# EAGLE board KAI_bat (EAGLE 9.5.1)
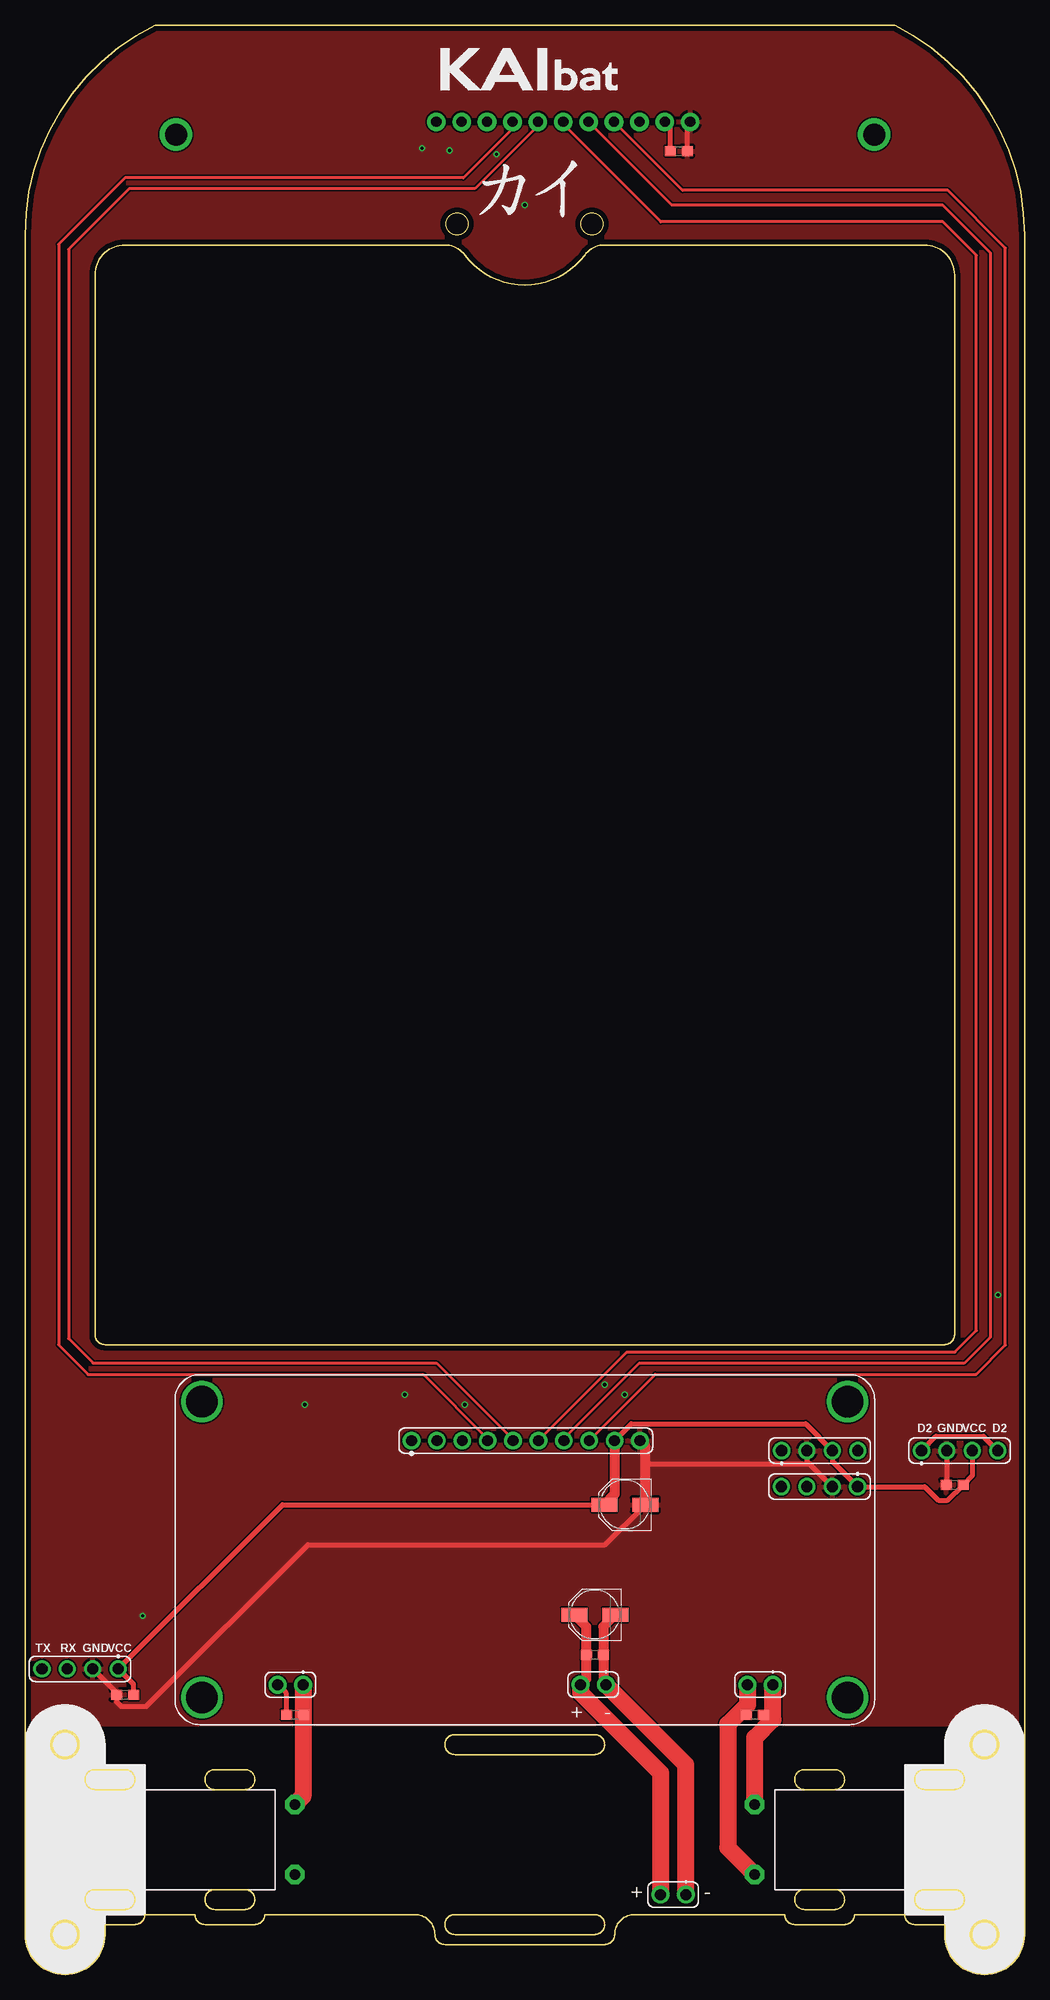
[diagram p0: board, top side]
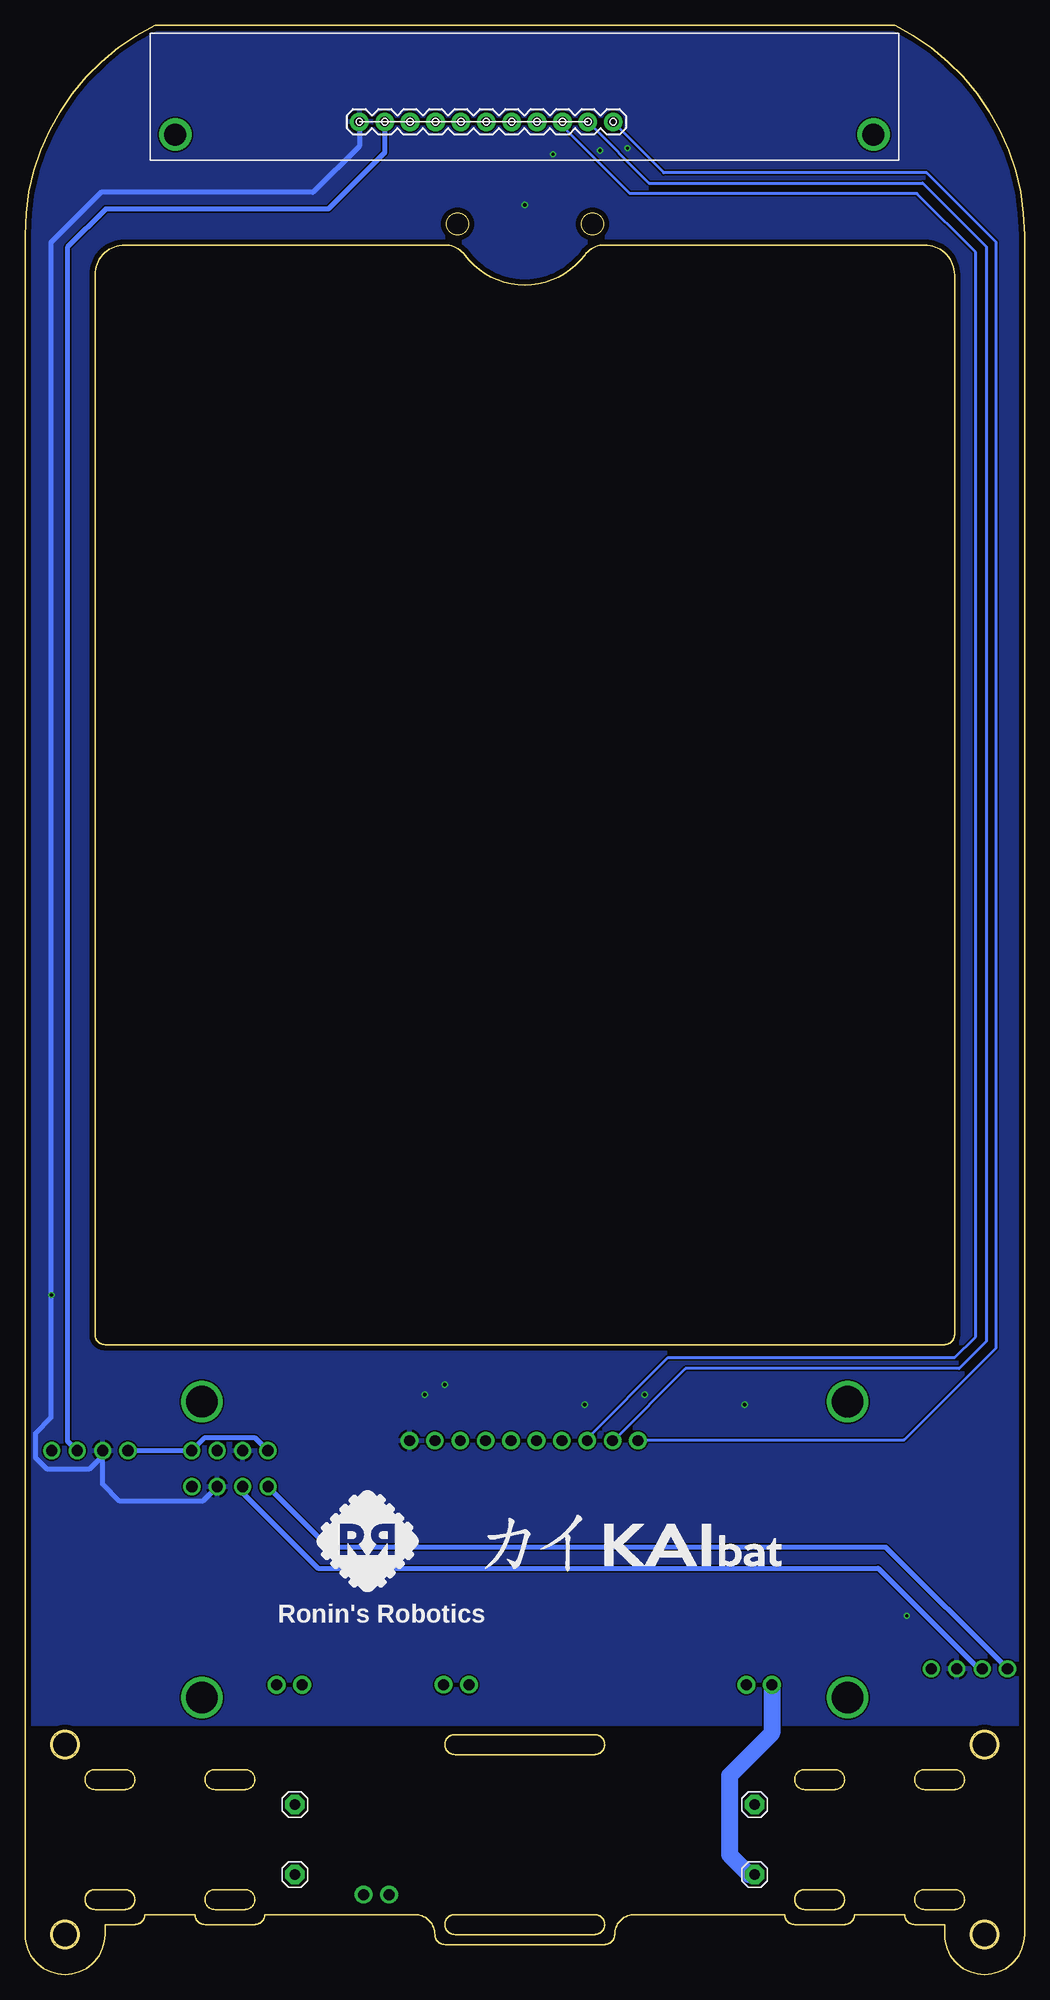
[diagram p1: board, bottom side, seen from below]

Size 100 x 195 mm. Coordinates in mm from the lower left corner, seen from the top.
Outline: 0,4 arc90 4,0 arc90 8,4 8,5 11,5 arc90 12,6 17,6 arc90 18,5 23,5 arc90 24,6 39,6 arc-90 41,4 arc90 42,3 58,3 arc90 59,4 arc-90 61,6 76,6 arc90 77,5 82,5 arc90 83,6 88,6 arc90 89,5 92,5 92,4 arc90 96,0 arc90 100,4 100,174 arc64 87,195 13,195 arc64 0,174 0,4
Outline: 7,170 7,64 arc90 8,63 92,63 arc90 93,64 93,170 arc90 90,173 58,173 arc53 56,172 arc-53 50,169 arc-53 44,172 arc53 42,173 10,173 arc90 7,170
Outline: 22,8.5 19,8.5 arc90 18,7.5 arc90 19,6.5 22,6.5 arc90 23,7.5 arc90 22,8.5
Outline: 22,20.5 19,20.5 arc180 19,18.5 22,18.5 arc180 22,20.5
Outline: 10,20.5 7,20.5 arc180 7,18.5 10,18.5 arc180 10,20.5
Outline: 10,8.5 7,8.5 arc180 7,6.5 10,6.5 arc180 10,8.5
Outline: 93,8.5 90,8.5 arc90 89,7.5 arc90 90,6.5 93,6.5 arc90 94,7.5 arc90 93,8.5
Outline: 93,20.5 90,20.5 arc180 90,18.5 93,18.5 arc180 93,20.5
Outline: 81,20.5 78,20.5 arc180 78,18.5 81,18.5 arc180 81,20.5
Outline: 81,8.5 78,8.5 arc180 78,6.5 81,6.5 arc180 81,8.5
Outline: 42,23 arc-90 43,24 57,24 arc-90 58,23 arc-90 57,22 43,22 arc-90 42,23
Outline: 42,5 arc-90 43,6 57,6 arc-90 58,5 arc-90 57,4 43,4 arc-90 42,5
Outline: circle at 56.73,175.1 radius 1.09
Outline: circle at 43.23,175.1 radius 1.09
Outline: circle at 4,4 radius 1.41
Outline: circle at 4,23 radius 1.41
Outline: circle at 96,23 radius 1.41
Outline: circle at 96,4 radius 1.41
Copper layers (1*16): Top 0.035mm / dielectric 1.6mm / Bottom 0.035mm
Design rules "Elecrow_2-layer_PCB_eagle_rule": minimum track width 6mil, minimum drill 12mil, track to track 6mil, track to pad 6mil, pad to pad 6mil, via to via 8mil, smd to smd 0mil, copper to edge 20mil, drill to drill 10mil, minimum pad ring 6mil, minimum via ring 6mil, stop-mask expansion 0mil, vias tented up to drill 100mil, thermal gap 10mil

## Footprints (pad centres in the part's own frame; a part is rotated, then mirrored left to right if it is on the bottom)
1X11 = drill 1.016 pad 1.88: 1 0,0; 2 2.54,0; 3 5.08,0; 4 7.62,0; 5 10.16,0; 6 12.7,0; 7 15.24,0; 8 17.78,0; 9 20.32,0; 10 22.86,0; 11 25.4,0
1X01 = drill 1.016 pad 1.93 octagon: 1 0,0
QTR-8 = drill 2.21: P$1 2.54,2.54; P$2 72.39,2.54
PANASONIC_C = smd 2.6 x 1.4: + 2.05,0; - -2.05,0
C0603 = smd 1.1 x 1: 1 -0.85,0; 2 0.85,0
1X10 = drill 1.092 pad 1.778: 1 -11.43,0; 2 -8.89,0; 3 -6.35,0; 4 -3.81,0; 5 -1.27,0; 6 1.27,0; 7 3.81,0; 8 6.35,0; 9 8.89,0; 10 11.43,0
HDRVR4W64P254_1X4_1016X240X800B = drill 1.105 pad 1.705: 1 0,0; 2 2.54,0; 3 5.08,0; 4 7.62,0
1X2 = drill 1.092 pad 1.778: P$1 0,0; P$2 2.54,0

## Placement (x,y rotation side)
E$1  [12M_MOTOR]  97,24 180 bottom
E$2  [12M_MOTOR]  3,3 0 bottom
E$3  [1X11]  66.55,185.31 0 bottom
E$4  [1X01]  27,17 0 bottom
E$5  [12MM_MMTOR]  0,8.5 0 top
E$6  [12MM_MMTOR]  100,18.5 180 top
E$7  [QTR-8]  87.5,181.5 0 bottom
E$8  [1X01]  27,10 0 bottom
E$9  [1X01]  73,17 0 bottom
E$10  [1X01]  73,10 0 bottom
E$11  [PANASONIC_C]  60,47 180 top
E$12  [PANASONIC_C]  57,36 180 top
E$13  [C0603]  10,28 0 top
E$14  [C0603]  93,49 0 top
E$15  [16MM_FORCEUP]  0,8.5 0 top
E$16  [16MM_FORCEUP]  100,18.5 180 top
E$17  [C0603]  27,26 0 top
E$18  [C0603]  57,32 0 top
E$19  [C0603]  73,26 0 top
E$20  [C0603]  65.4,182.39 0 top
JP1  [1X10]  50.1,53.4 0 top
U$1  FML_1X4  [HDRVR4W64P254_1X4_1016X240X800B]  9.32,30.57 180 top
U$2  FML_1X4  [HDRVR4W64P254_1X4_1016X240X800B]  89.7,52.4 0 top
U$3  1X2  [1X2]  66.12,7.99 180 top
U$13  1X2  [1X2]  74.83,28.99 180 top
U$15  1X2  [1X2]  27.82,28.98 180 top
U$18  1X2  [1X2]  58.12,28.99 180 top
U$34  FML_1X4  [HDRVR4W64P254_1X4_1016X240X800B]  83.3,48.8 180 top
U$43  FML_1X4  [HDRVR4W64P254_1X4_1016X240X800B]  75.7,52.4 0 top

## Library data of the parts
E$1 E$2 = 12mm_motor
E$3 = SparkFun-Connectors
E$4 E$8-E$10 = adafruit
E$5 E$6 = ball_caster
E$7 = qtr_8
E$11-E$14 E$17-E$20 = pasif_com1
E$15 E$16 = 16mm_motor
JP1 U$1-U$3 U$13 U$15 U$18 U$34 U$43 = header_3d

## Nets
+: E$12.+ E$18.1 U$3.P$2 U$18.P$2
-: E$12.- E$18.2 U$3.P$1 U$18.P$1
A0: E$3.4 JP1.8
A1: E$3.5 JP1.7
A2: E$3.6 JP1.6
A3: E$3.7 JP1.5
A4: E$3.8 JP1.4
A5: E$3.9 JP1.3
A6: E$3.10 JP1.2
A7: E$3.11 JP1.1
D2: U$2.1 U$2.4 U$43.1 U$43.4
GND: E$3.1 E$11.- E$13.1 E$14.1 E$20.2 JP1.10 U$1.2 U$2.2 U$34.2 U$43.2
N$10: E$8.1 E$17.1 U$15.P$2
N$11: E$9.1 E$19.2 U$13.P$1
N$17: E$10.1 E$19.1 U$13.P$2
N$20: E$4.1 E$17.2 U$15.P$1
RX: U$1.3 U$34.3
TX: U$1.4 U$34.4
VCC: E$3.2 E$11.+ E$13.2 E$14.2 E$20.1 JP1.9 U$1.1 U$2.3 U$34.1 U$43.3

## Tracks (layer width: path | path; a pad name or v marks a point on that pad's centre or on a via)
+
  Top 1: U$18.P$2 56.15,29.56 E$18.1 56.15,34.8 E$12.+
  Top 1.7: U$18.P$2 55.58,28.17 63.58,20.17 U$3.P$2
-
  Top 1: E$12.- 59.04,36 57.85,34.81 E$18.2 57.85,29.26 U$18.P$1
  Top 1.7: U$3.P$1 66.12,20.99 U$18.P$1
A0
  Top 0.305: JP1.8 56.45,53.45 63.05,60.05 95.17,60.05 98.1,62.97 98.1,172.68 92.33,178.45 65.79,178.45 E$3.4
A1
  Top 0.305: E$3.5 64.67,177.03 91.79,177.03 96.57,172.25 96.57,63.75 93.96,61.13 61.43,61.13 53.91,53.61 JP1.7
A2
  Top 0.305: JP1.6 51.37,53.41 60.21,62.25 93.03,62.25 95.18,64.4 95.18,171.96 91.84,175.31 63.61,175.31 53.85,185.06 E$3.6
A3
  Top 0.305: E$3.7 51.31,184.94 45,178.64 10.43,178.64 4.36,172.57 4.36,63.61 6.82,61.16 41.17,61.16 48.83,53.5 JP1.5
A4
  Top 0.305: E$3.8 48.77,184.62 43.86,179.71 10,179.71 3.35,173.06 3.35,62.98 6.31,60.02 39.85,60.02 46.29,53.59 JP1.4
A5
  Bottom 0.305: JP1.3 43.75,53.61 35.66,61.71 6.98,61.71 4.89,63.8 4.89,172.27 10.76,178.14 39.48,178.14 46.23,184.89 E$3.9
A6
  Bottom 0.305: E$3.10 37.57,179.19 10.2,179.19 3.85,172.84 3.85,63.31 6.54,60.62 33.92,60.62 41.14,53.4 JP1.2
A7
  Bottom 0.305: JP1.1 38.67,53.48 12.03,53.48 2.83,62.67 2.83,173.28 9.78,180.22 36.09,180.22 41.15,185.29 E$3.11
D2
  Top 0.5: U$2.1 91.14,53.84 95.88,53.84 U$2.4
  Bottom 0.5: U$43.1 76.97,53.67 82.05,53.67 U$43.4 U$2.1
GND  (via drill 0.3)
  Top 0.5: E$20.2 66.25,185.01 E$3.1 | U$2.2 92.24,49.09 E$14.1 | U$43.2 78.24,51.32 78.47,51.09 | 78.47,51.09 U$34.2 | 62.05,50.66 62.48,51.09 78.47,51.09 | U$1.2 9.15,28.2 E$13.1 9.15,27.27 9.6,26.82 12.13,26.82 28.3,42.99 58.04,42.99 E$11.-
  Top 1.016: E$11.- 62.05,50.66 62.05,52.88 JP1.10
  Bottom 0.5: E$3.1 66.55,182.9 71.18,178.26 92.39,178.26 97.4,173.25 97.4,55.7 98.97,54.13 98.97,51.72 97.84,50.59 93.51,50.59 92.24,51.86 U$2.2 92.24,49.06 90.51,47.33 82.23,47.33 U$34.2
  other vias: 50,177 28,57 11.77,35.87 38,58 44,57 60,58 58,59 97.35,67.97 47.17,182.07 42.45,182.45 39.74,182.68
  pour Top: 13,195 87,195 arc-90 100,182 100,25.05 0,25.05 0,182 arc-90
  pour Bottom: 87,195 13,195 arc90 0,182 0,25.06 100,25.06 100,182 arc90
N$6  (via drill 3.15)
  other vias: 17.7,57.3
N$8  (via drill 3.15)
  other vias: 82.3,57.3
N$10
  Top 0.5: E$17.1 26.15,28.11 U$15.P$2
  Bottom 1.7: U$15.P$2 25.28,24.13 29.52,19.89 29.52,11.98 27.54,10 E$8.1
N$11
  Top 0.5: E$19.2 74.34,26 74.83,25.52
  Top 1.7: E$9.1 73,23.69 74.83,25.52 U$13.P$1
N$12  (via drill 3.15)
  other vias: 82.3,27.7
N$13  (via drill 3.15)
  other vias: 17.7,27.7
N$17
  Top 0.5: E$19.1 72.15,28.85 U$13.P$2
  Top 1.7: U$13.P$2 72.29,27 70.32,25.04 70.32,12.68 E$10.1
N$20
  Top 0.254: E$17.2 27.82,26.03 U$15.P$1
  Top 1.7: U$15.P$1 27.82,17.82 E$4.1
RX
  Bottom 0.5: U$34.3 78.22,48.17 70.69,40.64 14.64,40.64 4.57,30.57 U$1.3
TX
  Bottom 0.5: U$34.4 69.65,42.77 13.9,42.77 U$1.4
VCC
  Top 0.5: E$20.1 64.55,184.77 E$3.2 | U$2.3 94.78,49.93 E$14.2 92.28,47.43 91.39,47.43 90.02,48.8 U$34.1 80.78,51.32 U$43.3 78.1,55.08 60.67,55.08 JP1.9 | E$11.+ 25.75,47 U$1.1 10.85,29.04 E$13.2
  Top 1.016: JP1.9 58.99,48.04 E$11.+
  Bottom 0.5: E$3.2 64.01,182.25 69.66,176.59 91.93,176.59 95.75,172.77 95.75,53.37 U$2.3

## Text on the board
tPlace: D2 | GND | VCC | D2 | TX | RX | GND | VCC | - | + | - | +
bPlace: Ronin's Robotics